# Altium PCB gest.PcbDoc
Units mil, origin at the board's own origin, x right, y up, seen from the top; angles counter-clockwise.
Board outline 6000 x 4000 mil, 2 copper layers (Top Layer, Bottom Layer); 13 components, 17 nets, 111 pads, 9 vias.
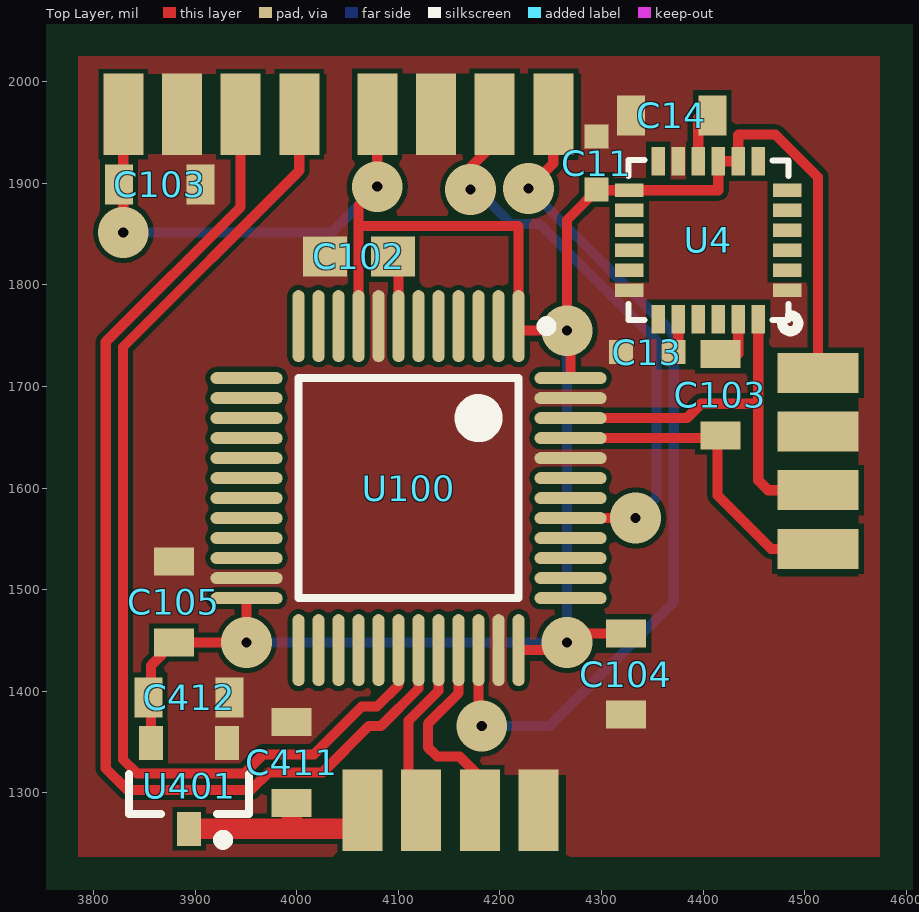
[diagram p0: Top Layer view]
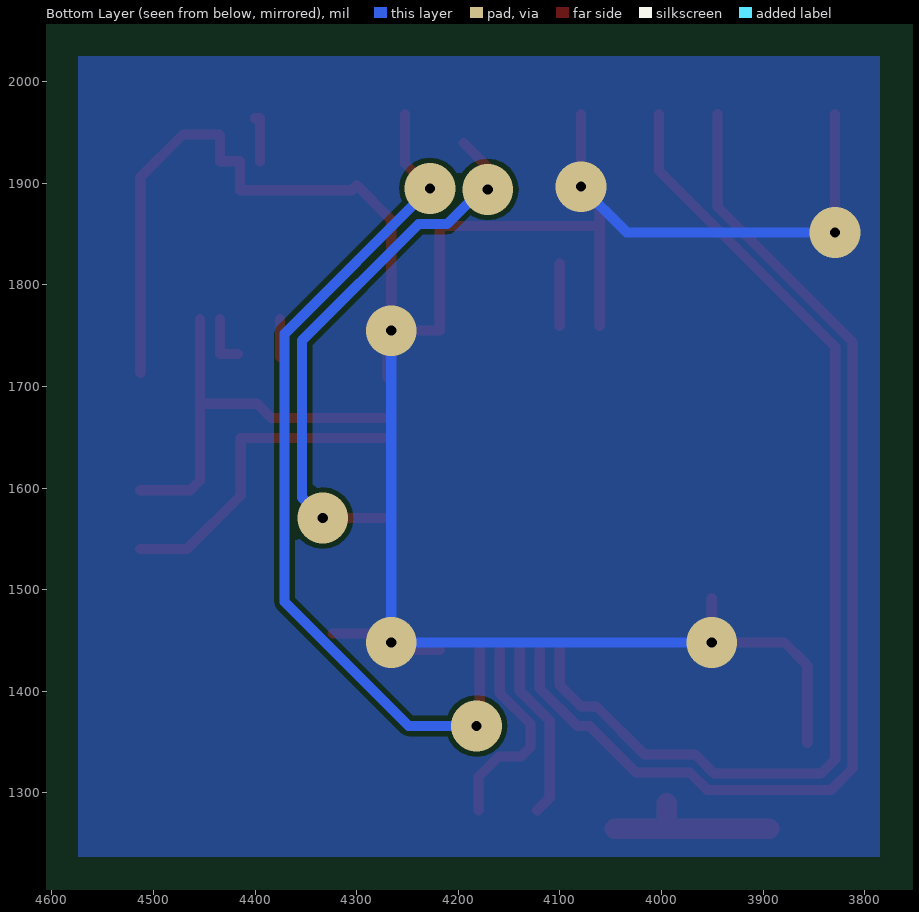
[diagram p1: Bottom Layer view, seen from below]

## Layer stack, top to bottom
Top Solder: solder mask 0.4, Solder Resist, Dk 3.5
Top Layer: signal copper 1.4
Dielectric 1: dielectric 12.6, FR-4, Dk 4.8
Bottom Layer: signal copper 1.4
Bottom Solder: solder mask 0.4, Solder Resist, Dk 3.5

## Board outline
1000,1000 7000,1000 7000,5000 1000,5000

## Design rules (kind name [scope] priority, off if disabled: settings)
Clearance [All] p1: gap=5
PolygonConnect [All] p1: connectstyle=Direct reliefconductorwidth=10 reliefentries=4 polygonreliefangle="90 Angle" airgapwidth=10
RoutingVias [All] p1: holewidth=28 width=100 viastyle="Through Hole" minholewidth=2 minwidth=2 maxholewidth=1001 maxwidth=50
SolderMaskExpansion [All] p1: expansion=4
Width [All] p1: maxlimit=100 minlimit=10 preferedwidth=10
30 further rules are at their usual default settings.

## Components (designator, comment, footprint, x,y, rotation, side; value= is the part's Value field where it differs from the comment)
C11 "Cap402" 0402x 4295,1920 r270 top
C13 "Cap603" 0402x 4345,1734 r0 top
C14 "Cap402" 0603x 4369,1967 r180 top
C102 "Cap" ERA-0603 4061,1828 r0 top
C103 "Cap" 0603x 4417,1692 r270 top
C103 "Cap" 0603x 3865,1899 r180 top
C104 "Cap" 0603x 4324,1417 r90 top
C105 "Cap" 0603x 3879,1488 r270 top
C411 "100nF 50V" 0603x 3995,1330 r90 top
C412 "100nF 50V" 0603x 3894,1394 r0 top
U4 "MPU-6050" IMU-3000 4405,1844 r180 top (schematic designator U3)
U100 "STM32F303C8T6" LQFP48_N 4110,1600 r270 top
U401 "NCV1117ST33" sot23_l 3894,1307 r270 top

## Footprints (in the part's own frame and the unit in brackets; to place one, negate y for a bottom-side part, rotate by r counter-clockwise, add the part's x,y. Pads: shape width x height; smd on the part's side, far side on the other; paste and mask are expansions set on the pad)
0402x [mm] "Chip Capacitor, Body 1.0x0.5mm, IPC Medium Density"
  rect 0.6x0.6 smd: 1(-0.66,0) 2(0.66,0)
  body extent -0.5,-0.25 0.5,0.25, height 0.6
0603x [mm] "Chip Resistor; Body 1.6 x 0.8 mm (LxW typ)"
  rect 0.7x1 smd: 1(-1.016,0) 2(1.016,0)
ERA-0603 [mm] "Chip Resistor; Body 1.6 x 0.8 mm (LxW typ)"
  rect 1.1x1 smd: 1(-0.85,0) 2(0.85,0)
IMU-3000 [mm]
  rect 0.711x0.337 smd paste-0.03 mask+0.04: 1(-1.975,1.25) 2(-1.975,0.75) 3(-1.975,0.25) 4(-1.975,-0.25) 5(-1.975,-0.75) 6(-1.975,-1.25) 13(1.975,-1.25) 14(1.975,-0.75) 15(1.975,-0.25) 16(1.975,0.25) 17(1.975,0.75) 18(1.975,1.25)
  rect 0.337x0.711 smd paste-0.03 mask+0.04: 7(-1.25,-1.975) 8(-0.75,-1.975) 9(-0.25,-1.975) 10(0.25,-1.975) 11(0.75,-1.975) 12(1.25,-1.975) 19(1.25,1.975) 20(0.75,1.975) 21(0.25,1.975) 22(-0.25,1.975) 23(-0.75,1.975) 24(-1.25,1.975)
  silkscreen extent -2.25,-2 2,2.27, body extent -2,-2 2,2, height 0.95
LQFP48_N [mm] "Thin QFP, 48-Leads, Body 7x7mm, Pitch 0.5mm, IPC Medium Density"
  oval 1.8x0.3 smd: 1(-4.05,2.75) 2(-4.05,2.25) 3(-4.05,1.75) 4(-4.05,1.25) 5(-4.05,0.75) 6(-4.05,0.25) 7(-4.05,-0.25) 8(-4.05,-0.75) 9(-4.05,-1.25) 10(-4.05,-1.75) 11(-4.05,-2.25) 12(-4.05,-2.75) 25(4.05,-2.75) 26(4.05,-2.25) 27(4.05,-1.75) 28(4.05,-1.25) 29(4.05,-0.75) 30(4.05,-0.25) 31(4.05,0.25) 32(4.05,0.75) 33(4.05,1.25) 34(4.05,1.75) 35(4.05,2.25) 36(4.05,2.75)
  oval 0.3x1.8 smd: 13(-2.75,-4.05) 14(-2.25,-4.05) 15(-1.75,-4.05) 16(-1.25,-4.05) 17(-0.75,-4.05) 18(-0.25,-4.05) 19(0.25,-4.05) 20(0.75,-4.05) 21(1.25,-4.05) 22(1.75,-4.05) 23(2.25,-4.05) 24(2.75,-4.05) 37(2.75,4.05) 38(2.25,4.05) 39(1.75,4.05) 40(1.25,4.05) 41(0.75,4.05) 42(0.25,4.05) 43(-0.25,4.05) 44(-0.75,4.05) 45(-1.25,4.05) 46(-1.75,4.05) 47(-2.25,4.05) 48(-2.75,4.05)
  silkscreen extent -4.17,-2.75 2.75,3.58, body extent -3.5,-3.5 3.5,3.5, height 1.6
sot23_l [mm] "SOT23, 3-Leads, Body 2.9x1.3mm, Pitch 0.95mm, Lead Span 2.3mm - Reverse Pinning, IPC High Density"
  rect 0.85x0.6 smd: 1(1.075,0) 2(-1.075,-0.95) 3(-1.075,0.95)
  silkscreen extent -0.3,-1.5 1.47,1.5, body extent -0.7,-1.5 0.7,1.5, height 1.1

## Part data
C11 C13 C14: "Capacitor SMD"
C102 C103 C103 C104 C105: "Capacitor"
C411 C412: library part Cap, "Capacitor"
U4: "Invensense MPU-6050  3-axis Gyros & Accel"
U100: library part STM32F103C6T6, "STM32 ARM-based 32-bit MCU with 32 Kbytes Flash, 48-pin LQFP, Industrial Temperature"
U401: library part REG1117-3.3, "800mA and 1A Low Dropout Positive Regulator 3.3V"

## Free pads (board coordinates)
  rect 39.37x80 smd: 0(3829.26,1968) 0(4064.62,1282.94) 0(4079.26,1968) 1(3887,1968) 1(4122.36,1282.94) 1(4137,1968) 2(3944.74,1968) 2(4180.11,1282.94) 2(4194.74,1968) 3(4002.49,1968) 3(4237.85,1282.94) 3(4252.49,1968)
  rect 80x39.37 smd: 0(4513,1713.49) 1(4513,1655.74) 2(4513,1598) 3(4513,1540.26)

## Via types
v1: diameter 50, hole 10, Top Layer to Bottom Layer, 9 vias

## Nets (pads, with @x,y where several pads share a name; then routed paths per layer and width w, separated by ;. In a path a pad name is that pad's centre, name@x,y a point inside that pad or via, vN(x,y) a via of type N, cw(c..) or ccw(c..) an arc to the next point about the centre after c; other vN are vias at no path point)
3.3V: C11.2 C103.2@3825,1899 C104.2 C105.2 C412.1 pad.0@3829.26,1968 pad.0@4079.26,1968 pad.0@4513,1713.49 U4.8 U4.9 U4.13 U100.1 U100.9 U100.24 U100.36 U100.48 U401.2 | length 2641.8
  Top Layer w10: v1(3829.26,1851.74) pad.0@3829.26,1968 ; U401.2 3856.6,1425.6 C105.2 v1(3950.55,1448) U100.24 ; pad.0@4079.26,1968 v1(4079.26,1896.74) 4060.79,1878.27 U100.9 4060.79,1858 4218.27,1858 U100.1 ; U100.36 v1@4266,1440.55 ; U100.1@4218.27,1755 v1(4266,1755) 4266,1864 4300,1898 4304.79,1893.21 U4.13 4414.84,1893.21 U4.9 U4.8 4434.53,1947.53 4435,1948 4471,1948 4513,1906 pad.0@4513,1713.49 ; v1(4266,1448) 4275,1457 C104.2 ; U100.48 v1@4269.45,1755
  Bottom Layer w10: v1(3829.26,1851.74) 4034.26,1851.74 v1(4079.26,1896.74) ; v1(3950.55,1448) v1(4266,1448) v1(4266,1755)
5V: C411.1 pad.0@4064.62,1282.94 U401.1 | length 176.7
  Top Layer w20: U401.1 pad.0@4046.35,1264.68 ; 3995,1265.68 C411.1
DM: pad.1@4122.36,1282.94 U100.32 | length 175
  Top Layer w10: pad.1@4122.36,1282.94 4110,1295.31 4110,1371 4139.53,1400.53 U100.32
DP: pad.2@4180.11,1282.94 U100.33 | length 204.2
  Top Layer w10: U100.33 4159.21,1398.21 4129,1368 4129,1345 4138,1336 4160,1336 4180.11,1315.89 pad.2@4180.11,1282.94
GND: C11.1 C13.1 C14.2 C102.1 C103.1@3905,1899 C104.1 C105.1 C411.2 C412.2 pad.1@3887,1968 pad.1@4137,1968 pad.1@4513,1655.74 pad.3@4237.85,1282.94 U4.1 U4.11 U4.18 U100.8 U100.23 U100.35 U100.44 U100.47 U401.3
NetC13_2: C13.2 U4.20 | length 37.2
  Top Layer w10: C13.2@4375.47,1729 U4.20
NetC14_1: C14.1 U4.10 | length 47.1
  Top Layer w10: U4.10 4395.16,1964 C14.1@4400,1964
NetC102_2: C102.2 U100.7 | length 61.6
  Top Layer w10: U100.7 C102.2@4100.16,1821.09
NetC103_1: C103.1@4417,1732 U4.23 | length 51.8
  Top Layer w10: C103.1@4417,1732 4434.53,1732 U4.23
SCL1: C103.2@4417,1652 pad.3@4513,1540.26 U100.45 | length 321.7
  Top Layer w10: U100.45 4414.21,1649.21 4414.21,1592.79 4466.74,1540.26 pad.3@4513,1540.26
SCL2: pad.3@4002.49,1968 U100.30 | length 1054.3
  Top Layer w10: pad.3@4002.49,1968 4002.49,1912.49 3829,1739 3829,1333 3843,1319 3948,1319 3967,1338 4017,1338 4064,1385 4079,1385 4100.16,1406.16 U100.30
SCL3: U100.29
SDA1: pad.2@4513,1598 U4.24 U100.46 | length 411.9
  Top Layer w10: U100.46 4383.9,1668.9 4398,1683 4454.21,1683 ; U4.24 4454.21,1683 ; pad.2@4513,1598 4464,1598 4454.21,1607.79 4454.21,1683
SDA2: pad.2@3944.74,1968 U100.31 | length 1094.6
  Top Layer w10: pad.2@3944.74,1968 3944.74,1876.74 3812,1744 3812,1324 3833,1303 3955,1303 3972,1320 4025,1320 4071,1366 4083,1366 4119.84,1402.84 U100.31
SDA3: pad.2@4194.74,1968 U100.41 | length 554.8
  Top Layer w10: v1(4171,1894) 4171,1916 pad.2@4194.74,1939.74 ; U100.41 v1(4333.47,1570.47)
  Bottom Layer w10: v1(4171,1894) 4171,1889 4176.5,1894.5 4211,1860 4239,1860 4354,1745 4354,1591 v1(4333.47,1570.47)
SWCLK: U100.37
SWDIO: pad.3@4252.49,1968 U100.34 | length 864.7
  Top Layer w10: U100.34 4178.9,1369.1 v1(4182,1366) ; v1(4228,1895) 4252.49,1919.49 pad.3@4252.49,1968
  Bottom Layer w10: v1(4182,1366) 4249,1366 4371,1488 4371,1752 v1(4228,1895)
pads on no net: U4.2 U4.3 U4.4 U4.5 U4.6 U4.7 U4.12 U4.14 U4.15 U4.16 U4.17 U4.19 U4.21 U4.22 U100.2 U100.3 U100.4 U100.5 U100.6 U100.10 U100.11 U100.12 U100.13 U100.14 U100.15 U100.16 U100.17 U100.18 U100.19 U100.20 U100.21 U100.22 U100.25 U100.26 U100.27 U100.28 U100.38 U100.39 U100.40 U100.42 U100.43

## Polygon pours and split planes (outlines as drawn)
GND on Top Layer "Top Layer-No Net" (solid, pour order 0): 3785,2025 3785,1237 4574,1237 4574,2025
3.3V on Bottom Layer "Top Layer-No Net" (solid, pour order 2): 3785,2025 3785,1237 4574,1237 4574,2025

## Other copper
Top Layer:
  pour cut-out: 4265,1317.94 4265,1238.94 4040,1238.94 4040,1317.94 4104,1317.94 4141,1317.94
  pour cut-out: 4029.64,2007.63 4029.64,1928.63 3804.64,1928.63 3804.64,2007.63 3868.64,2007.63 3905.64,2007.63
  pour cut-out: 4279.64,2007.63 4279.64,1928.63 4054.64,1928.63 4054.64,2007.63 4118.64,2007.63 4155.64,2007.63
  pour cut-out: 4552.63,1513.11 4473.63,1513.11 4473.63,1738.11 4552.63,1738.11 4552.63,1674.11 4552.63,1637.11